# Altium PCB Layout.PcbDoc
Units mm, origin at the board's own origin, x right, y up, seen from the top; angles counter-clockwise.
Board outline 65 x 52 mm, 2 copper layers (Top Layer, Bottom Layer); 43 components, 63 nets, 190 pads, 5 vias.
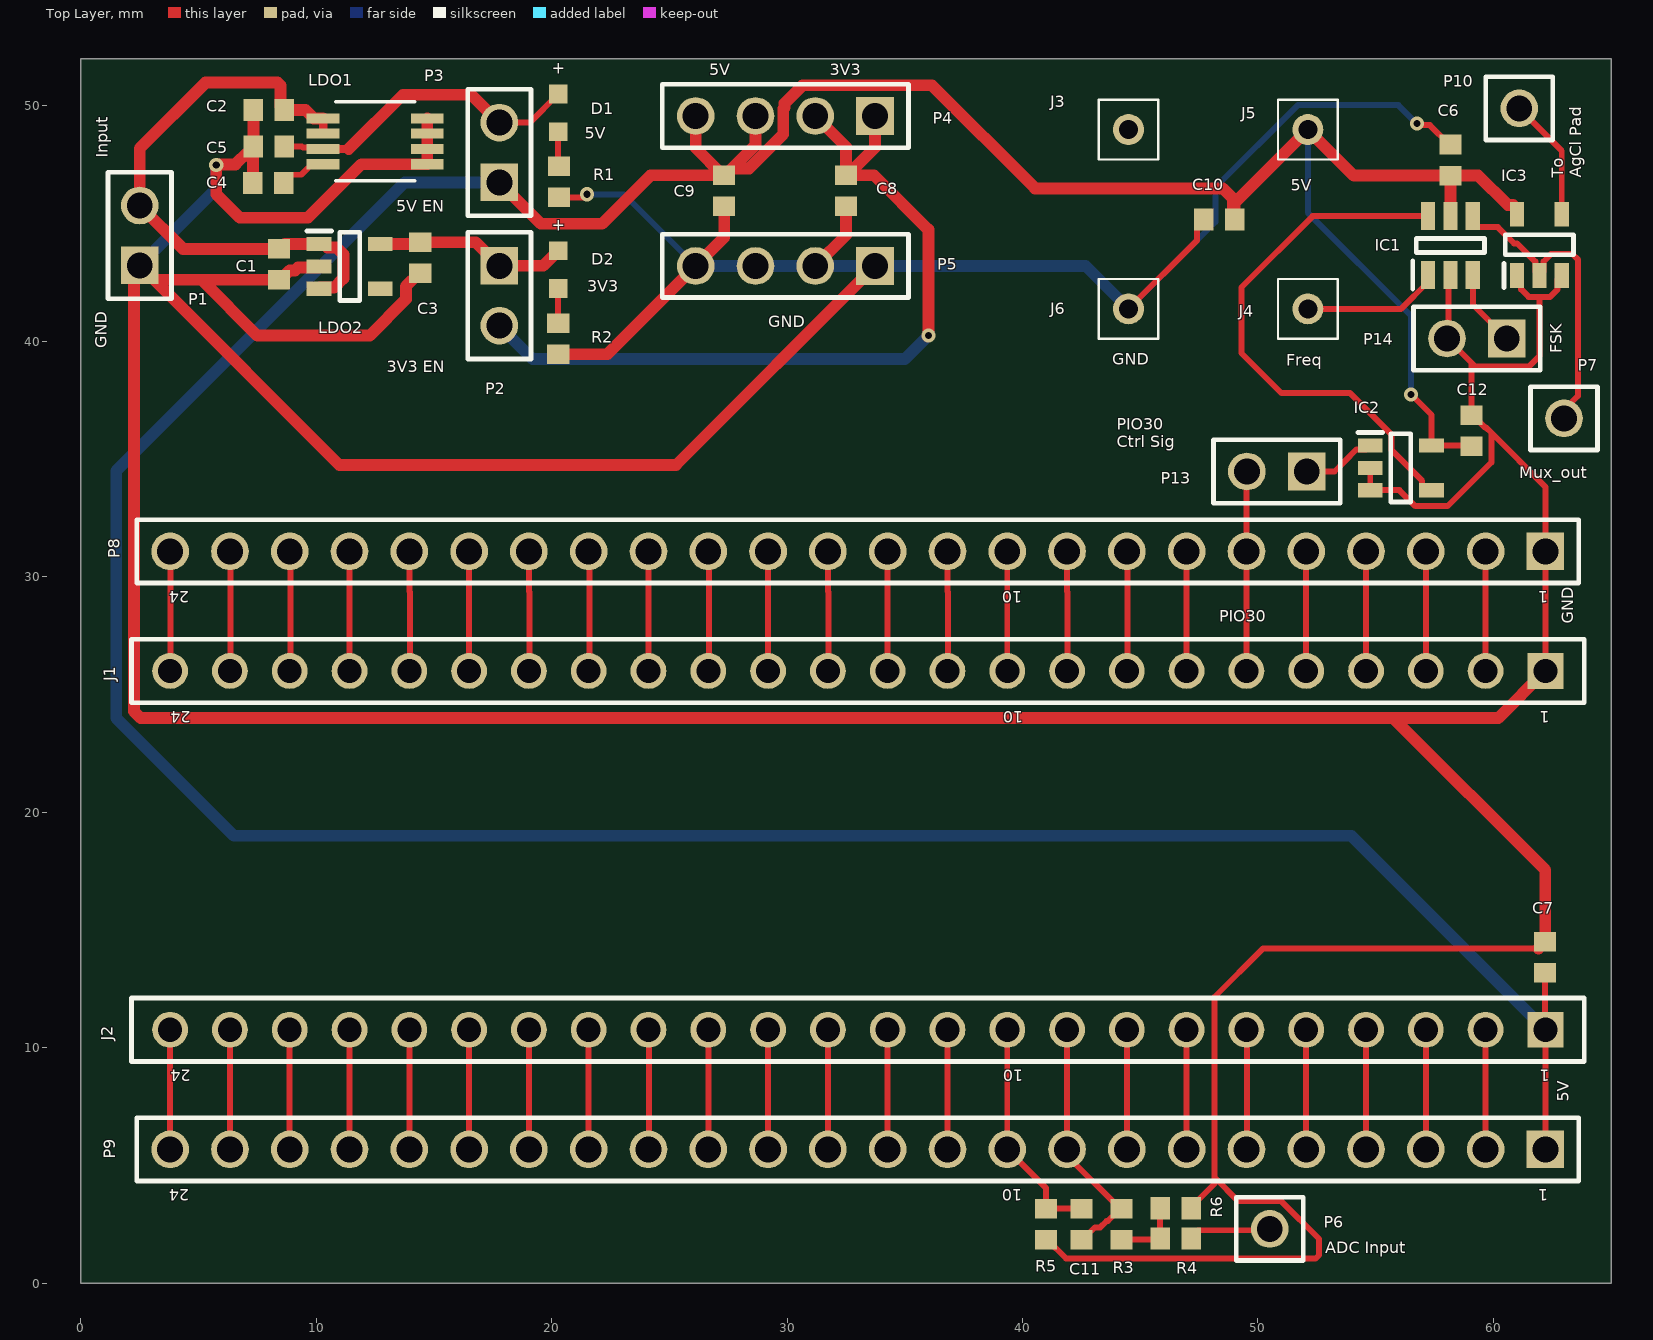
[diagram p0: Top Layer view]
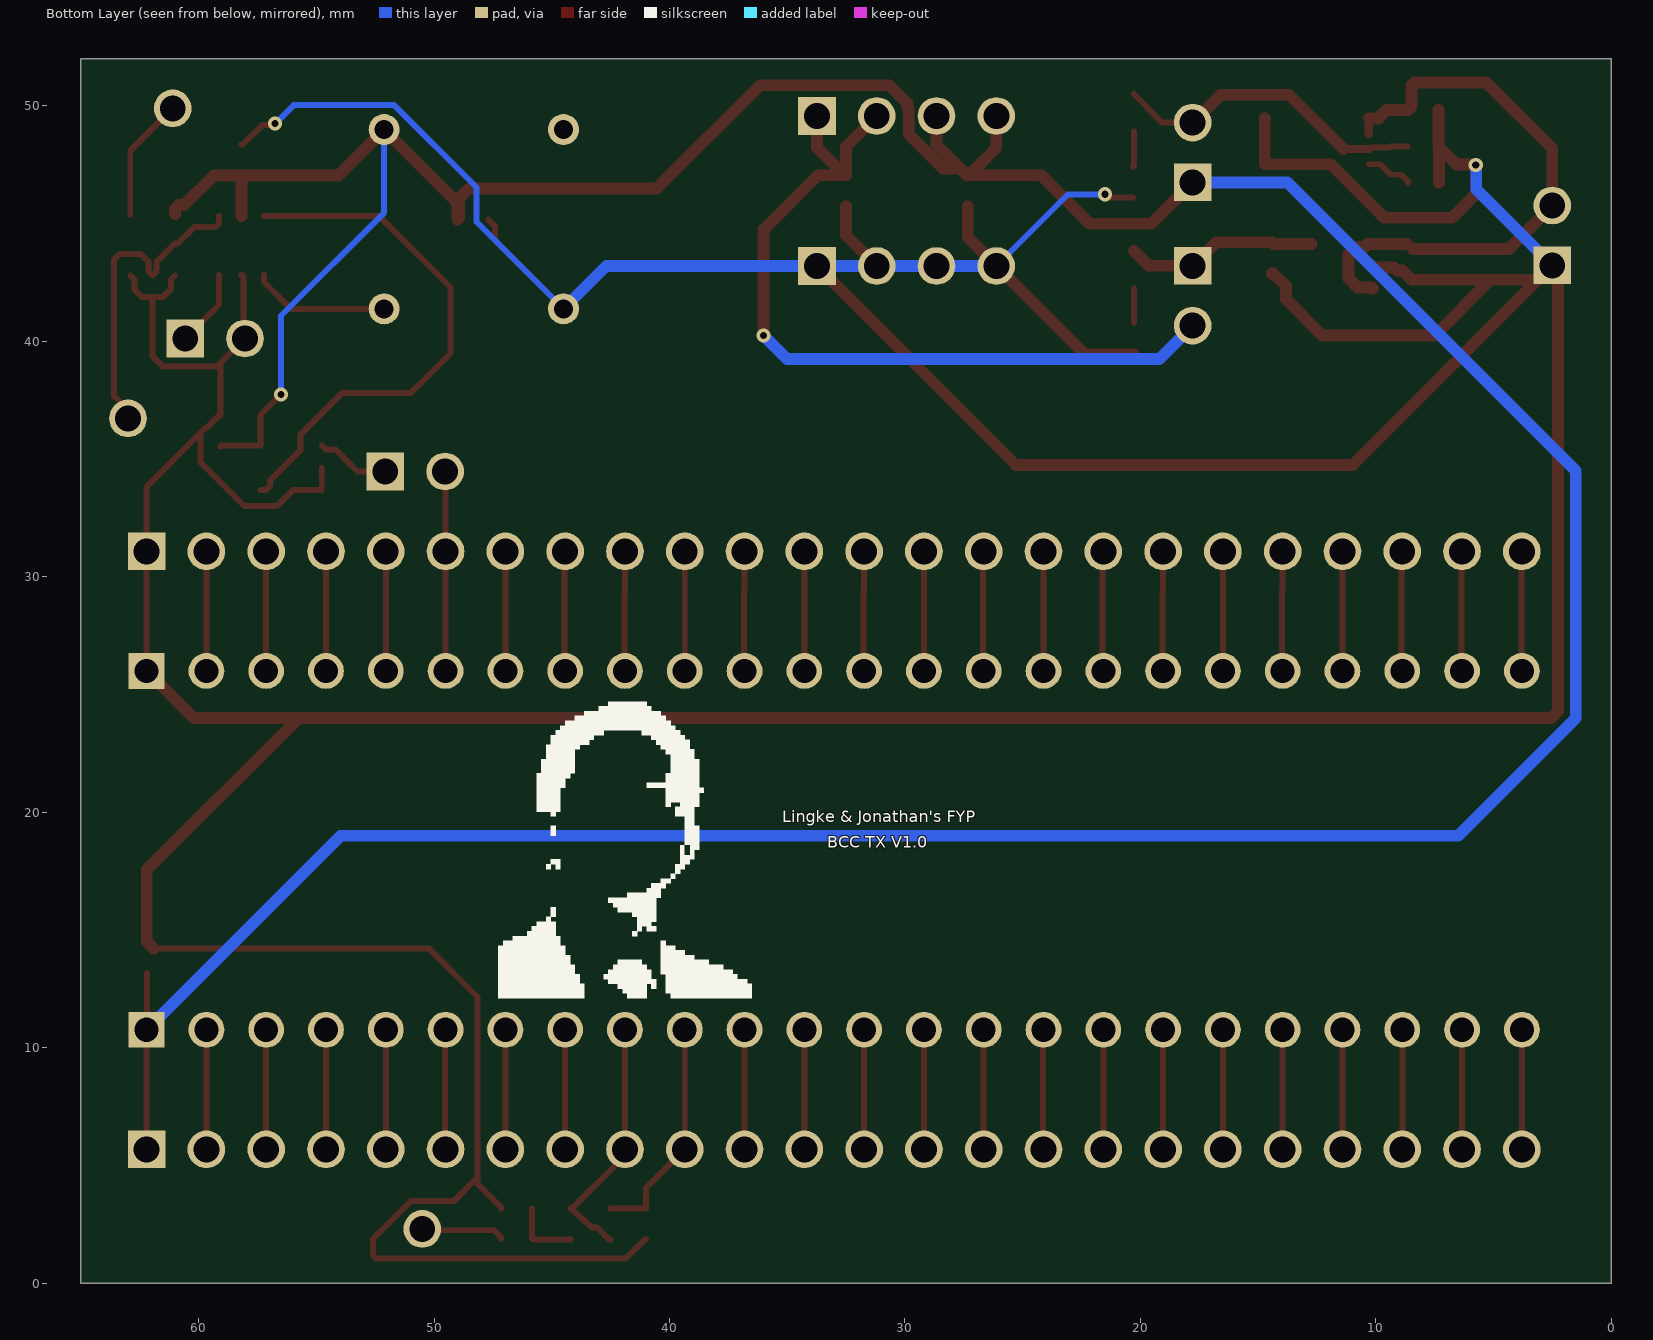
[diagram p1: Bottom Layer view, seen from below]
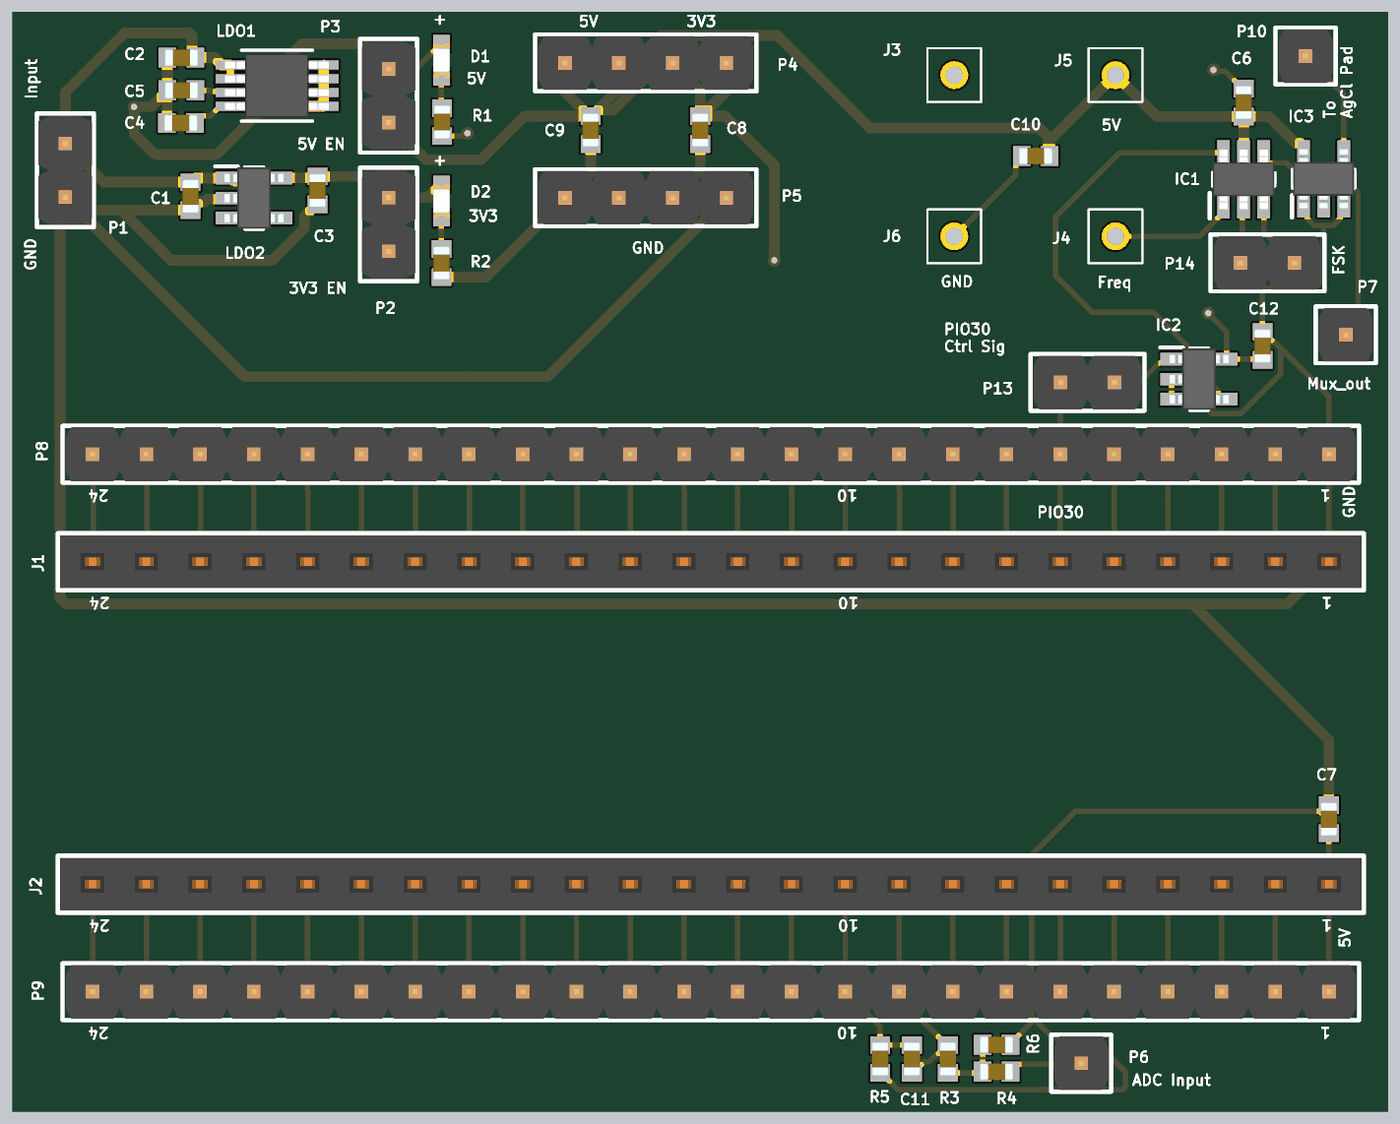
[diagram p2: 3D render of the assembled board from above, using the file's embedded part models]

## Layer stack, top to bottom
Top Solder: solder mask 0.0102, Solder Resist, Dk 3.5
Top Layer: signal copper 0.0356
Dielectric 1: dielectric 0.32, FR-4, Dk 4.8
Bottom Layer: signal copper 0.0356
Bottom Solder: solder mask 0.0102, Solder Resist, Dk 3.5

## Board outline
0,52 65,52 65,0 0,0

## Design rules (kind name [scope] priority, off if disabled: settings)
Clearance [All] p1: gap=0.254 ignorepadtopadclearanceinfootprint=TRUE
HoleToHoleClearance [All] p1: gap=0.1 allowstackedmicrovias=TRUE
MinimumSolderMaskSliver [All] p1: minsoldermaskwidth=0.1
PolygonConnect [All] p1: connectstyle=Direct reliefconductorwidth=0.254 reliefentries=4 polygonreliefangle="90 Angle" airgapwidth=0.254
RoutingVias [All] p1: holewidth=0.711 width=1.27 viastyle="Through Hole" minholewidth=0.3 minwidth=0.6 maxholewidth=0.711 maxwidth=1.27
SilkToSilkClearance [All] p1: silktosilkclearance=0.1
SilkToSolderMaskClearance [IsPad] p1: minsilkscreentomaskgap=0.1 clearancetoexposedcopper=TRUE
SolderMaskExpansion [All] p1: expansion=0.102 istentingtop=FALSE
Width GND [InNet('GND')] p1: maxlimit=0.5 minlimit=0.254 preferedwidth=0.254
Width Vin [InNet('Vin')] p2: maxlimit=1 minlimit=0.254 preferedwidth=0.508
Width [All] p3: maxlimit=5 minlimit=0.254 preferedwidth=0.254
26 further rules are at their usual default settings.

## Components (designator, comment, footprint, x,y, rotation, side; value= is the part's Value field where it differs from the comment)
C1 "1uF" 0603 8.417,43.275 r90 top
C2 "1uF" 0603 7.986,49.825 r0 top
C3 "1uF" 0603 14.416,43.55 r90 top
C4 "470pF" 0603 7.961,46.737 r0 top
C5 "4.7uF" 0603 7.986,48.281 r0 top
C6 "0.1uF" 0603 58.175,47.704 r270 top
C7 "0.1uF" 0603 62.2,13.834 r270 top
C8 "0.1uF" 0603 32.5,46.4 r90 top
C9 "0.1uF" 0603 27.325,46.4 r90 top
C10 "0.1uF" 0603 48.35,45.175 r0 top
C11 "1nF" 0603 42.5,2.5 r270 top
C12 "0.1uF" 0603 59.068,36.2 r270 top
D1 "Super Red, 1.9V" WL-SMCW_0603_H=0.7mm 20.274,49.708 r90 top
D2 "Super Red, 1.9V" WL-SMCW_0603_H=0.7mm 20.274,43.047 r90 top
IC1 "TS5A3160DBVR" SOT-23-6 58.175,44.074 r90 top
IC2 "SN74LV1T32DBVRG4" SOT-23-5 56.069,34.629 r0 top
IC3 "74LVC1G125DBVRG4" SOT-23-5 61.954,44.1 r90 top
J1 "61302411821" 61302411821 33,26 r180 top
J2 "61302411821" 61302411821 33,10.76 r180 top
J3 "SSA-101-S-T" SSA-101-S-X 44.5,49 r0 top
J4 "SSA-101-S-T" SSA-101-S-X 52.12,41.38 r0 top
J5 "SSA-101-S-T" SSA-101-S-X 52.12,49 r0 top
J6 "SSA-101-S-T" SSA-101-S-X 44.5,41.38 r0 top
LDO1 "MIC5219-5.0YMM-TR" MSOP-8_MS 12.5,48.5 r0 top
LDO2 "MIC5317-3.3YM5-TR" SOT-23-5 11.417,43.189 r0 top
P1 "01x02 Male Header" 61300211121 2.5,44.5 r90 top
P2 "01x02 Male Header" 61300211121 17.775,41.941 r270 top
P3 "01x02 Male Header" 61300211121 17.775,48.025 r90 top
P4 "Aux Power Vout" 61300411121 29.925,49.575 r180 top
P5 "Aux Power GND" 61300411121 29.925,43.206 r180 top
P6 "61300111121" 61300111121 50.5,2.3 r0 top
P7 "Pin to AgCl pad" 61300111121 63,36.731 r0 top
P8 "61302411121" 61302411121 33,31.08 r180 top
P9 "61302411121" 61302411121 33,5.68 r180 top
P10 "Pin to AgCl pad" 61300111121 61.1,49.9 r0 top
P13 "61300211121" 61300211121 50.8,34.474 r180 top
P14 "61300211121" 61300211121 59.3,40.125 r180 top
R1 "1k" 0603 20.304,46.779 r270 top
R2 "1k" 0603 20.275,40.118 r90 top
R3 "140" 0603 44.2,2.5 r90 top
R4 "2.32K" 0603 46.5,1.9 r0 top
R5 "845" 0603 41,2.5 r90 top
R6 "1K" 0603 46.5,3.175 r180 top

## Footprints (in the part's own frame and the unit in brackets; to place one, negate y for a bottom-side part, rotate by r counter-clockwise, add the part's x,y. Pads: shape width x height; smd on the part's side, far side on the other; paste and mask are expansions set on the pad)
0603 [mm]
  rect 0.83x0.94 smd: 1(-0.66,0) 2(0.66,0)
  body extent -0.8,-0.4 0.8,0.4, height 0.9
61300111121 [mm] "Pin Header, pitch 2.54 mm, THT, Vertical, single row, 1p"
  round 1.6 hole 1.1: 1(0,0)
  silkscreen extent -1.42,-1.35 1.42,1.35, body extent -1.27,-1.27 1.27,1.27, height 8.57
61300211121 [mm] "Pin Header, pitch 2.54 mm, THT, Vertical, single row, 2p"
  rect 1.6x1.6 hole 1.1: 1(-1.27,0)
  round 1.6 hole 1.1: 2(1.27,0)
  silkscreen extent -2.69,-1.35 2.69,1.34, body extent -2.54,-1.27 2.54,1.27, height 8.57
61300411121 [mm] "Pin Header, pitch 2.54 mm, THT, Vertical, single row, 4p"
  rect 1.6x1.6 hole 1.1: 1(-3.81,0)
  round 1.6 hole 1.1: 2(-1.27,0) 3(1.27,0) 4(3.81,0)
  silkscreen extent -5.23,-1.35 5.23,1.35, body extent -5.08,-1.27 5.08,1.27, height 8.57
61302411121 [mm] "Pin Header, pitch 2.54 mm, THT, Vertical, single row, 24p"
  rect 1.6x1.6 hole 1.1: 1(-29.21,0)
  round 1.6 hole 1.1: 2(-26.67,0) 3(-24.13,0) 4(-21.59,0) 5(-19.05,0) 6(-16.51,0) 7(-13.97,0) 8(-11.43,0) 9(-8.89,0) 10(-6.35,0) 11(-3.81,0) 12(-1.27,0) 13(1.27,0) 14(3.81,0) 15(6.35,0) 16(8.89,0) 17(11.43,0) 18(13.97,0) 19(16.51,0) 20(19.05,0) 21(21.59,0) 22(24.13,0) 23(26.67,0) 24(29.21,0)
  silkscreen extent -30.63,-1.34 30.63,1.35, body extent -30.48,-1.27 30.48,1.27, height 8.57
61302411821 [mm] "Socket Header, Pitch 2.54 mm, THT, Vertical, single row, 24p"
  rect 1.52x1.52 hole 1.02: 1(-29.21,0)
  round 1.52 hole 1.02: 2(-26.67,0) 3(-24.13,0) 4(-21.59,0) 5(-19.05,0) 6(-16.51,0) 7(-13.97,0) 8(-11.43,0) 9(-8.89,0) 10(-6.35,0) 11(-3.81,0) 12(-1.27,0) 13(1.27,0) 14(3.81,0) 15(6.35,0) 16(8.89,0) 17(11.43,0) 18(13.97,0) 19(16.51,0) 20(19.05,0) 21(21.59,0) 22(24.13,0) 23(26.67,0) 24(29.21,0)
  silkscreen extent -30.86,-1.35 30.86,1.35, body extent -30.73,-1.25 30.73,1.25, height 8.55
MSOP-8_MS [mil]
  rect 55x17 smd mask+4.53: 1(-87,38.39) 2(-87,12.8) 3(-87,-12.8) 4(-87,-38.39) 5(87,-38.39) 6(87,-12.8) 7(87,12.8) 8(87,38.39)
  silkscreen extent -66,-66 66,66, body extent -96,-59 96,59, height 43
SOT-23-5 [mm]
  rect 1.05x0.6 smd: 1(-1.3,0.95) 2(-1.3,0) 3(-1.3,-0.95) 4(1.3,-0.95) 5(1.3,0.95)
  silkscreen extent -1.83,-1.45 0.43,1.5, body extent -1.4,-1.45 1.4,1.45, height 1
SOT-23-6 [mm]
  rect 1.2x0.6 smd: 1(-1.25,0.95) 2(-1.25,0) 3(-1.25,-0.95) 4(1.25,-0.95) 5(1.25,0) 6(1.25,0.95)
  silkscreen extent -1.85,-1.45 0.3,1.6, body extent -1.4,-1.45 1.4,1.45, height 1.2
SSA-101-S-X [mm]
  round 1.31 hole 0.81: 1(0,0)
  silkscreen extent -1.27,-1.27 1.27,1.27
WL-SMCW_0603_H=0.7mm [mm] "SMD Mono-color Chip LED, body 1.6x0.8mm"
  rect 0.8x0.8 smd: 1(-0.8,0) 2(0.8,0)
  body extent -0.8,-0.4 0.8,0.4, height 0.7

## Part data
C1 C2 C3 C4 C5 C6 C7 C8 C9 C10 C11 C12: library part Capacitor, "Capacitor"
D1 D2: library part 150060SS75000, "WL-SMCW SMT Mono-color Chip LED Waterclear, size 0603, Super Red, 1.9V, 140deg", Emitting Color="Super Red", Forward Voltage typ.=1.9V, Operating Temperature="-40 to +85degC", Chip Technology=AlInGaP, ComponentLink1Description=Manufacturer, ComponentLink1URL=http://www.we-online.de, ComponentLink2Description=Datasheet, ComponentLink2URL=https://www.we-online.com/catalog/datasheet/150060SS75000.pdf, Dominant Wavelength typ.=630nm, Luminous Intensity typ.=60mcd, Mounting Technology=SMT, Packaging="Tape and Reel", Part Number=150060SS75000, Peak Wavelength typ.=645nm, Published Date="December 2019", Publisher="Wurth Elektronik", Size=0603, Viewing Angle=140deg
IC1: "Integrated Circuit", Manufacturer_Name="Texas Instruments", Mouser2 Part Number=595-TS5A3160DBVR, Datasheet Link=http://www.ti.com/lit/gpn/ts5a3160, Height=1.45mm, Manufacturer_Part_Number=TS5A3160DBVR, Mouser2 Price/Stock=https://www.mouser.com/Search/Refine.aspx?Keyword=595-TS5A3160DBVR
IC2: Supplier Part Number 1=595-SN74LV1T32DBVRG4, Supplier 1=Mouser
IC3: Supplier Part Number 1=595-74LVC1G125DBVRG4, Supplier 1=Mouser
J1 J2: "WR-PHD Socket Header, THT, pitch 2.54mm, Single Row, Vertical, 24p", Contact Resistance=20mOhm, Manufacturer="Wurth Elektronik", Operating Temperature="-40 to +125degC", Rated Current=3A, Withstanding Voltage=500VAC, Working Voltage=250VAC, ComponentLink1Description=Manufacturer, ComponentLink1URL=http://www.we-online.de, ComponentLink2Description=Datasheet, ComponentLink2URL=https://www.we-online.com/catalog/datasheet/61302411821.pdf, Gender="Socket Header", Manufacturer Part Number=61302411821, Mounting Technology=THT, Orientation=Vertical, Packaging=Tray, Pin Number=24, Pitch=2.54mm, Published Date="May 2020", Row Number=Single
J3 J4 J5 J6: "Connector", Manufacturer_Name=SAMTEC, Datasheet Link=http://suddendocs.samtec.com/prints/ssas-mkt.pdf, Manufacturer_Part_Number=SSA-101-S-T
LDO2: "Power Supply", Manufacturer_Name=Microchip, Mouser2 Part Number=998-MIC5317-3.3YM5TR, Datasheet Link=https://componentsearchengine.com//MIC5317-3.3YM5-TR.pdf, Height=1mm, Manufacturer_Part_Number=MIC5317-3.3YM5-TR, Mouser2 Price/Stock=https://www.mouser.com/Search/Refine.aspx?Keyword=998-MIC5317-3.3YM5TR
P1 P2 P3: library part 61300211121, "WR-PHD Pin Header, THT, pitch 2.54mm, Single Row, Vertical, 2p", Contact Resistance=20mOhm, Manufacturer="Wurth Elektronik", Operating Temperature="-40 to +105degC", Rated Current=3A, Withstanding Voltage=500VAC, Working Voltage=250VAC, ComponentLink1Description=Manufacturer, ComponentLink1URL=http://www.we-online.de, ComponentLink2Description=Datasheet, ComponentLink2URL=https://www.we-online.com/catalog/datasheet/61300211121.pdf, Gender="Pin Header", Manufacturer Part Number=61300211121, Mounting Technology=THT, Orientation=Vertical, Packaging=Bag, Pin Number=2, Pitch=2.54mm, Published Date="May 2020", Row Number=Single
P4 P5: library part 61300411121, "WR-PHD Pin Header, THT, pitch 2.54mm, Single Row, Vertical, 4p", Contact Resistance=20mOhm, Manufacturer="Wurth Elektronik", Operating Temperature="-40 to +105degC", Rated Current=3A, Withstanding Voltage=500VAC, Working Voltage=250VAC, ComponentLink1Description=Manufacturer, ComponentLink1URL=http://www.we-online.de, ComponentLink2Description=Datasheet, ComponentLink2URL=https://www.we-online.com/catalog/datasheet/61300411121.pdf, Gender="Pin Header", Manufacturer Part Number=61300411121, Mounting Technology=THT, Orientation=Vertical, Packaging=Bag, Pin Number=4, Pitch=2.54mm, Published Date="May 2020", Row Number=Single
P6: "WR-PHD Pin Header, THT, pitch 2.54mm, Single Row, Vertical, 1p", Contact Resistance=20mOhm, Manufacturer="Wurth Elektronik", Operating Temperature="-40 to +105degC", Rated Current=3A, Withstanding Voltage=500VAC, Working Voltage=250VAC, ComponentLink1Description=Manufacturer, ComponentLink1URL=http://www.we-online.de, ComponentLink2Description=Datasheet, ComponentLink2URL=https://www.we-online.com/catalog/datasheet/61300111121.pdf, Gender="Pin Header", Manufacturer Part Number=61300111121, Mounting Technology=THT, Orientation=Vertical, Packaging=Bag, Pin Number=1, Pitch=2.54mm, Published Date="May 2020", Row Number=Single
P7 P10: library part 61300111121, "WR-PHD Pin Header, THT, pitch 2.54mm, Single Row, Vertical, 1p", Contact Resistance=20mOhm, Manufacturer="Wurth Elektronik", Operating Temperature="-40 to +105degC", Rated Current=3A, Withstanding Voltage=500VAC, Working Voltage=250VAC, ComponentLink1Description=Manufacturer, ComponentLink1URL=http://www.we-online.de, ComponentLink2Description=Datasheet, ComponentLink2URL=https://www.we-online.com/catalog/datasheet/61300111121.pdf, Gender="Pin Header", Manufacturer Part Number=61300111121, Mounting Technology=THT, Orientation=Vertical, Packaging=Bag, Pin Number=1, Pitch=2.54mm, Published Date="May 2020", Row Number=Single
P8 P9: "WR-PHD Pin Header, THT, pitch 2.54mm, Single Row, Vertical, 24p", Contact Resistance=20mOhm, Manufacturer="Wurth Elektronik", Operating Temperature="-40 to +105degC", Rated Current=3A, Withstanding Voltage=500VAC, Working Voltage=250VAC, ComponentLink1Description=Manufacturer, ComponentLink1URL=http://www.we-online.de, ComponentLink2Description=Datasheet, ComponentLink2URL=https://www.we-online.com/catalog/datasheet/61302411121.pdf, Gender="Pin Header", Manufacturer Part Number=61302411121, Mounting Technology=THT, Orientation=Vertical, Packaging=Bag, Pin Number=24, Pitch=2.54mm, Published Date="May 2020", Row Number=Single
P13 P14: "WR-PHD Pin Header, THT, pitch 2.54mm, Single Row, Vertical, 2p", Contact Resistance=20mOhm, Manufacturer="Wurth Elektronik", Operating Temperature="-40 to +105degC", Rated Current=3A, Withstanding Voltage=500VAC, Working Voltage=250VAC, ComponentLink1Description=Manufacturer, ComponentLink1URL=http://www.we-online.de, ComponentLink2Description=Datasheet, ComponentLink2URL=https://www.we-online.com/catalog/datasheet/61300211121.pdf, Gender="Pin Header", Manufacturer Part Number=61300211121, Mounting Technology=THT, Orientation=Vertical, Packaging=Bag, Pin Number=2, Pitch=2.54mm, Published Date="May 2020", Row Number=Single
R1 R2 R3 R4 R5 R6: library part Resistor, "Resistor"

## Via types
v1: diameter 0.6, hole 0.3, Top Layer to Bottom Layer, 5 vias

## Nets (pads, with @x,y where several pads share a name; then routed paths per layer and width w, separated by ;. In a path a pad name is that pad's centre, name@x,y a point inside that pad or via, vN(x,y) a via of type N, cw(c..) or ccw(c..) an arc to the next point about the centre after c; other vN are vias at no path point)
3V3: C8.2 P2.2 P4.1 P4.2 | length 34.2
  Top Layer w0.5: P4.2 32.5,48.27 C8.2 33.69,47.06 36,44.75 v1(36,40.25) ; C8.2@32.555,47.06 33.735,48.24 P4.1
  Bottom Layer w0.5: P2.2 19.196,39.25 35,39.25 v1(36,40.25)
5V: C6.2 C7.2 C9.2 C10.2 C12.2 IC1.5 IC2.5 IC3.5 J2.1 J5.1 P3.1 P4.3 P4.4 P9.1 | length 183.8
  Top Layer w0.254: v1(56.5,37.75) 57.369,36.881 IC2.5 59.029,35.579 C12.2 ; C7.2 62.2,10.77 J2.1 P9.1
  Top Layer w0.5: P3.1 19.53,45 22.138,45 24.198,47.06 C9.2@27.27,47.06 ; P4.4 26.115,48.215 C9.2@27.27,47.06 ; P4.3 28.655,48.335 C9.2@27.668,47.348 ; IC1.5 C6.2 ; IC3.5 61.004,45.625 60.831,45.798 60.606,45.798 59.361,47.044 C6.2 ; C9.2@27.27,47.06 C9.2 27.38,47.06 C9.2@27.668,47.348 ; C9.2@27.668,47.348 28.386,47.348 29.836,48.798 29.836,49.886 29.891,49.941 29.891,50.115 30.655,50.879 36.152,50.879 40.531,46.5 48.5,46.5 48.945,46.055 48.945,45.24 C10.2 49.01,45.89 J5.1 54.077,47.044 C6.2
  Bottom Layer w0.254: J5.1 52.12,45.469 56.5,41.089 v1(56.5,37.75)
  Bottom Layer w0.5: P3.1 13.755,46.755 1.5,34.5 1.5,24 6.5,19 53.97,19 J2.1
Adx_N: C11.1 J2.10 P9.10 R5.2 | length 9.8
  Top Layer w0.254: J2.10 P9.10 41,4.03 R5.2 C11.1
Adx_P: C11.2 J2.9 P9.9 R3.2 | length 10.8
  Top Layer w0.254: J2.9 P9.9 41.89,5.415 R3.2@44.145,3.16 ; C11.2 42.555,1.84 43.079,2.364 43.3,2.364 43.572,2.636 43.621,2.636 R3.2@44.145,3.16 ; R3.2 R3.2@44.145,3.16
"Carrier Freq Out": IC1.1 J4.1 | length 5.9
  Top Layer w0.254: J4.1 56.081,41.38 57.225,42.524 IC1.1
Ctrl_sig: IC1.6 IC2.4 | length 23
  Top Layer w0.254: IC1.6 52.324,45.324 49.3,42.3 49.3,39.5 51,37.8 53.912,37.8 55.675,36.037 55.675,35.373 56.971,34.077 56.971,33.852 57.144,33.679 IC2.4
GND: C1.1 C2.1 C3.1 C4.1 C5.1 C6.1 C7.1 C8.1 C9.1 C10.1 C12.1 IC1.2 IC2.2 IC2.3 IC3.1 IC3.3 J1.1 J6.1 LDO1.5 LDO1.6 LDO1.7 LDO1.8 LDO2.2 P1.1 P5.1 P5.2 P5.3 P5.4 P8.1 P14.2 R1.2 R2.1 R5.1 R6.1 | length 315.5
  Top Layer w0.254: R1.2 21.369,46.119 v1(21.5,46.25) ; R5.1 41.055,1.84 41.851,1.044 52.448,1.044 52.597,1.193 52.597,1.873 50.989,3.481 49.17,3.481 48.151,4.5 ; J6.1 47.402,44.282 47.402,44.887 C10.1 ; R6.1 47.16,3.23 48.151,4.221 48.151,4.5 ; IC2.2 IC2.3 56.005,33.679 56.686,32.998 58.052,32.998 59.919,34.866 59.919,36.113 ; v1(56.75,49.25) 56.816,49.184 57.3,49.184 58.12,48.363 C6.1 ; IC1.2 58.102,42.752 58.102,40.198 P14.2 59.068,39.086 ; IC3.1 61.177,42.627 61.177,42.213 61.496,41.894 61.954,41.894 ; C7.1@61.912,14.206 50.206,14.206 48.151,12.151 48.151,4.5 ; J1.1 P8.1 62.21,33.822 59.919,36.113 ; IC3.3 62.731,42.627 62.731,42.213 62.412,41.894 61.954,41.894 ; 59.068,39.086 59.211,38.944 61.528,38.944 61.954,39.37 61.954,41.894 ; 59.068,39.086 C12.1 59.123,36.86 59.647,36.336 59.696,36.336 59.919,36.113
  Top Layer w0.5: C4.1 7.313,46.749 C5.1@7.313,48.213 ; C2.1 C5.1 7.326,48.226 C5.1@7.313,48.213 ; LDO2.2 10.067,43.139 9.219,43.139 9.096,43.016 8.873,43.016 8.472,42.615 C1.1 5.135,42.615 ; C3.1 14.361,42.89 13.804,42.333 13.804,41.788 12.266,40.25 7.5,40.25 5.135,42.615 ; LDO1.8 LDO1.7 LDO1.6 LDO1.5 11.917,47.525 9.642,45.25 6.75,45.25 5.75,46.25 v1(5.75,47.5) 5.769,47.519 6.564,47.519 7.106,48.061 7.161,48.061 C5.1@7.313,48.213 ; R2.1 22.367,39.458 P5.4 27.325,44.416 C9.1 ; P5.2 32.5,44.511 C8.1 ; P5.1 25.279,34.75 10.98,34.75 P1.1@3.115,42.615 ; C7.1@61.912,14.206 C7.1 62.2,17.55 55.75,24 ; J1.1 60.21,24 55.75,24 ; P1.1@3.115,42.615 P1.1 2.25,42.98 2.25,24.293 2.543,24 55.75,24 ; P1.1@3.115,42.615 5.135,42.615
  Bottom Layer w0.254: v1(21.5,46.25) 23.071,46.25 P5.4 ; J6.1 48.196,45.076 48.196,46.542 51.691,50.036 55.964,50.036 v1(56.75,49.25)
  Bottom Layer w0.5: P1.1 5.731,46.461 5.731,47.481 v1(5.75,47.5) ; P5.4 P5.3 P5.2 P5.1 42.674,43.206 J6.1
Lvl_shft: IC2.1 P13.1 | length 3.2
  Top Layer w0.254: P13.1 53.251,34.474 53.669,34.892 ; 53.669,34.893 54.182,35.406 54.596,35.406 IC2.1
NetC3_2: C3.2 D2.2 LDO2.5 P2.1 | length 8.3
  Top Layer w0.5: LDO2.5 14.345,44.139 C3.2 16.776,44.21 P2.1 19.638,43.211 D2.2
NetC4_2: C4.2 LDO1.4 | length 2
  Top Layer w0.254: C4.2 8.621,46.791 8.909,47.08 9.362,47.08 9.808,47.525 LDO1.4
NetC5_2: C5.2 D1.2 LDO1.3 P3.2 | length 13.6
  Top Layer w0.254: C5.2 9.381,48.281 9.434,48.228 10.237,48.228 LDO1.3 ; P3.2 19.061,49.295 D1.2
  Top Layer w0.35: LDO1.3 11.375,48.175
  Top Layer w0.5: 11.375,48.175 13.682,50.482 16.588,50.482 P3.2
NetD1_1: D1.1 R1.1 | length 1.5
  Top Layer w0.254: D1.1 20.274,47.469 R1.1
NetD2_1: D2.1 R2.2 | length 1.5
  Top Layer w0.254: R2.2 D2.1
NetIC1_3: IC1.3 P14.1 | length 3.3
  Top Layer w0.254: IC1.3 59.125,41.57 P14.1
NetIC3_4: IC3.4 P10.1 | length 5.2
  Top Layer w0.254: P10.1 62.904,48.096 IC3.4
NetJ1_2: J1.2 P8.2 | length 5.1
  Top Layer w0.254: J1.2 P8.2
NetJ1_3: J1.3 P8.3 | length 5.1
  Top Layer w0.254: J1.3 P8.3
NetJ1_4: J1.4 P8.4 | length 5.1
  Top Layer w0.254: J1.4 P8.4
NetJ1_5: J1.5 P8.5 | length 5.1
  Top Layer w0.254: J1.5 P8.5
NetJ1_7: J1.7 P8.7 | length 5.1
  Top Layer w0.254: J1.7 P8.7
NetJ1_8: J1.8 P8.8 | length 5.1
  Top Layer w0.254: J1.8 44.455,26.025 44.455,31.08 P8.8
NetJ1_9: J1.9 P8.9 | length 5.1
  Top Layer w0.254: J1.9 41.915,26.025 41.915,29.362 41.89,29.387 P8.9
NetJ1_10: J1.10 P8.10 | length 5.1
  Top Layer w0.254: J1.10 P8.10
NetJ1_11: J1.11 P8.11 | length 5.1
  Top Layer w0.254: J1.11 36.835,26.025 36.835,29.362 36.81,29.387 P8.11
NetJ1_12: J1.12 P8.12 | length 5.1
  Top Layer w0.254: J1.12 P8.12
NetJ1_13: J1.13 P8.13 | length 5.1
  Top Layer w0.254: J1.13 31.755,26.025 31.755,29.362 31.73,29.387 P8.13
NetJ1_14: J1.14 P8.14 | length 5.1
  Top Layer w0.254: J1.14 P8.14
NetJ1_15: J1.15 P8.15 | length 5.1
  Top Layer w0.254: J1.15 26.675,26.025 26.675,31.08 P8.15
NetJ1_16: J1.16 P8.16 | length 5.1
  Top Layer w0.254: J1.16@24.11,26 P8.16
NetJ1_17: J1.17 P8.17 | length 5.1
  Top Layer w0.254: J1.17 21.595,26.025 21.595,31.08 P8.17
NetJ1_18: J1.18 P8.18 | length 5.1
  Top Layer w0.254: J1.18 19.055,26.025 19.055,29.362 19.03,29.387 P8.18
NetJ1_19: J1.19 P8.19 | length 5.1
  Top Layer w0.254: J1.19 P8.19
NetJ1_20: J1.20 P8.20 | length 5.1
  Top Layer w0.254: J1.20 13.975,26.025 13.975,29.362 13.95,29.387 P8.20
NetJ1_21: J1.21 P8.21 | length 5.1
  Top Layer w0.254: J1.21 P8.21
NetJ1_22: J1.22 P8.22 | length 5.1
  Top Layer w0.254: J1.22 8.895,26.025 8.895,31.08 P8.22
NetJ1_23: J1.23 P8.23 | length 5.1
  Top Layer w0.254: J1.23 6.355,26.025 6.355,31.08 P8.23
NetJ1_24: J1.24 P8.24 | length 5.1
  Top Layer w0.254: J1.24 3.815,26.025 3.815,31.08 P8.24
NetJ2_2: J2.2 P9.2 | length 5.1
  Top Layer w0.254: P9.2 J2.2
NetJ2_3: J2.3 P9.3 | length 5.1
  Top Layer w0.254: P9.3 J2.3
NetJ2_4: J2.4 P9.4 | length 5.1
  Top Layer w0.254: P9.4 J2.4
NetJ2_5: J2.5 P9.5 | length 5.1
  Top Layer w0.254: P9.5 J2.5
NetJ2_6: J2.6 P9.6 | length 5.1
  Top Layer w0.254: P9.6 49.535,5.68 49.535,10.735 J2.6
NetJ2_7: J2.7 P9.7 | length 5.1
  Top Layer w0.254: P9.7 J2.7
NetJ2_8: J2.8 P9.8 | length 5.1
  Top Layer w0.254: P9.8 J2.8
NetJ2_11: J2.11 P9.11 | length 5.1
  Top Layer w0.254: P9.11 J2.11
NetJ2_12: J2.12 P9.12 | length 5.1
  Top Layer w0.254: P9.12 J2.12
NetJ2_13: J2.13 P9.13 | length 5.1
  Top Layer w0.254: P9.13 J2.13
NetJ2_14: J2.14 P9.14 | length 5.1
  Top Layer w0.254: P9.14 J2.14
NetJ2_15: J2.15 P9.15 | length 5.1
  Top Layer w0.254: P9.15 J2.15
NetJ2_16: J2.16 P9.16 | length 5.1
  Top Layer w0.254: P9.16 24.135,5.68 24.135,10.735 J2.16
NetJ2_17: J2.17 P9.17 | length 5.1
  Top Layer w0.254: P9.17 J2.17
NetJ2_18: J2.18 P9.18 | length 5.1
  Top Layer w0.254: P9.18 J2.18
NetJ2_19: J2.19 P9.19 | length 5.1
  Top Layer w0.254: P9.19 J2.19
NetJ2_20: J2.20 P9.20 | length 5.1
  Top Layer w0.254: P9.20 J2.20
NetJ2_21: J2.21 P9.21 | length 5.1
  Top Layer w0.254: P9.21 J2.21
NetJ2_22: J2.22 P9.22 | length 5.1
  Top Layer w0.254: P9.22 J2.22
NetJ2_23: J2.23 P9.23 | length 5.1
  Top Layer w0.254: P9.23 J2.23
NetJ2_24: J2.24 P9.24 | length 5.1
  Top Layer w0.254: P9.24 J2.24
NetP6_1: P6.1 R4.2 | length 3.5
  Top Layer w0.254: R4.2 47.16,1.955 47.448,2.243 50.443,2.243 P6.1
NetR3_1: R3.1 R4.1 R6.2 | length 2.9
  Top Layer w0.254: R3.1 45.78,1.84 R4.1 R6.2
Pin_30: J1.6 P8.6 P13.2 | length 8.5
  Top Layer w0.254: J1.6 P8.6 49.52,31.09 49.52,34.464 P13.2
To_Buffer: IC1.4 IC3.2 P7.1 | length 13.6
  Top Layer w0.254: IC1.4 59.125,45.024 59.298,44.851 60.189,44.851 60.873,44.167 61.001,44.167 61.781,43.387 61.781,42.973 IC3.2 62.127,42.973 62.127,43.387 62.446,43.706 63.362,43.706 63.585,43.483 63.585,37.68 63,37.095 P7.1
Vin: C1.2 C2.2 LDO1.1 LDO1.2 LDO2.1 LDO2.3 P1.2 | length 24.8
  Top Layer w0.35: LDO1.2 LDO1.1
  Top Layer w0.508: C1.2 4.335,43.935 P1.2 2.5,48.2 5.3,51 8.348,51 8.485,50.863 8.485,49.986 C2.2 9.548,49.825 9.846,49.527 9.846,49.513 9.884,49.475 LDO1.1 ; C1.2@8.676,44.139 LDO2.1 10.342,44.139 10.484,43.997 10.852,43.997 11.15,43.699 11.15,42.678 10.756,42.285 10.163,42.285 LDO2.3
pads on no net: J3.1 LDO2.4

## Silkscreen, mask and mechanical layers (free items; w line width, h text height)
Top Overlay:
  text "5V" at 26.7,51.3 h0.5
  text "3V3" at 31.8,51.3 h0.5
  text "5V" at 21.4,48.6 h0.5
  text "Input" at 1.133,47.8 h0.5 r90
  text "To  / AgCl Pad" at 63.725,46.95 h0.5 r90
  text "5V" at 51.4,46.4 h0.5
  text "5V EN" at 13.4,45.5 h0.5
  text "3V3" at 21.5,42.1 h0.5
  text "GND" at 29.2,40.6 h0.5
  text "GND" at 1.1,39.7 h0.5 r90
  text "FSK" at 62.9,39.5 h0.5 r90
  text "GND" at 43.8,39 h0.5
  text "Freq" at 51.2,38.967 h0.5
  text "3V3 EN" at 13,38.7 h0.5
  text "PIO30 / Ctrl Sig" at 44,35.5 h0.5
  text "Mux_out" at 61.1,34.183 h0.5
  text "PIO30" at 48.35,28.1 h0.5
  text "GND" at 63.4,28 h0.5 r90
  text "5V" at 63.2,7.7 h0.5 r90
  text "ADC Input" at 52.85,1.267 h0.5
Bottom Overlay:
  drawing of 6 lines, arcs and shapes, not listed
  text "Lingke & Jonathan's FYP" at 35.2,19.567 h0.5
  text "BCC TX V1.0" at 33.3,18.5 h0.5
Board Outline:
  the board outline again, w0.2

## Text inside footprints (layer, text, board x,y; h text height)
D1: Top Overlay "+" at 20.574,51.808 h0.5 r180
D2: Top Overlay "+" at 20.574,45.147 h0.5 r180
J1: Top Overlay "10" at 40.03,24.3 h0.5 r180; Top Overlay "1" at 62.4,24.3 h0.5 r180; Top Overlay "24" at 4.66,24.3 h0.5 r180
J2: Top Overlay "10" at 40.03,9.06 h0.5 r180; Top Overlay "1" at 62.4,9.06 h0.5 r180; Top Overlay "24" at 4.66,9.06 h0.5 r180
P8: Top Overlay "24" at 4.61,29.38 h0.5 r180; Top Overlay "10" at 39.98,29.38 h0.5 r180; Top Overlay "1" at 62.33,29.38 h0.5 r180
P9: Top Overlay "24" at 4.61,3.98 h0.5 r180; Top Overlay "10" at 39.98,3.98 h0.5 r180; Top Overlay "1" at 62.33,3.98 h0.5 r180